# Altium PCB C2Sv0_PROCESSOR.PcbDoc (part 3 of 3)
Units mm, origin at the board's own origin, x right, y up, seen from the top; angles counter-clockwise.
Board outline 116 x 70 mm, 4 copper layers (Top Layer, Mid Layer 1, Mid Layer 2, Bottom Layer), stack 1.57 mm thick; 172 components, 108 nets, 793 pads, 402 vias.
Unrouted connection lines stored in the file: 3.
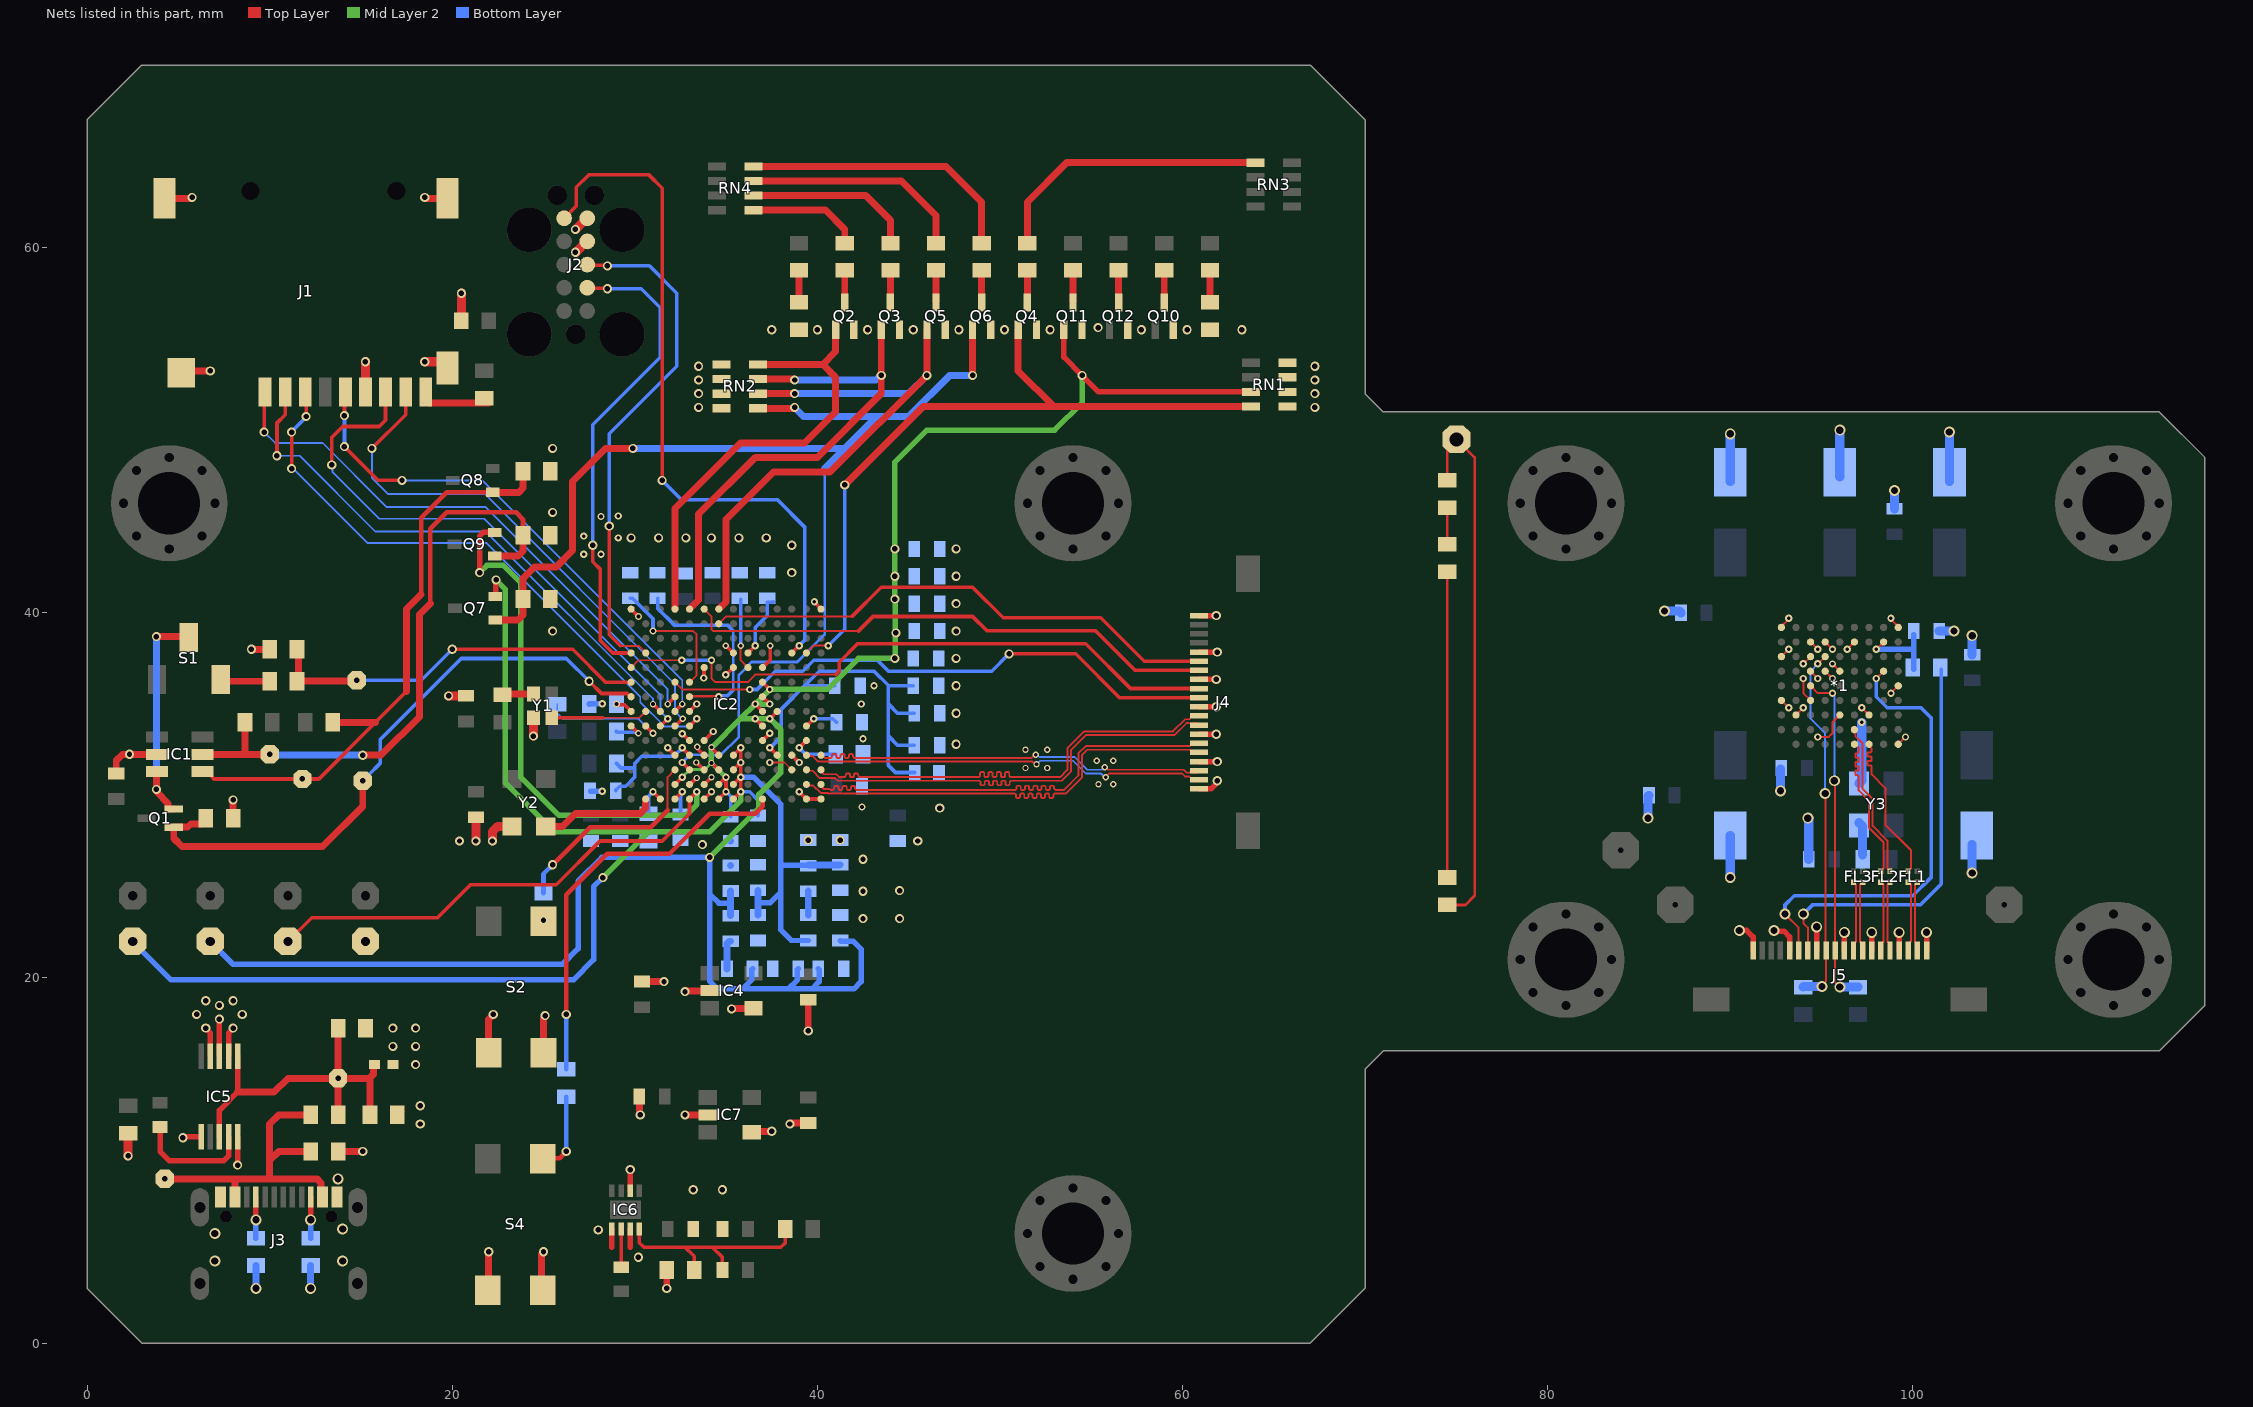
[diagram p4: the nets of this part, all layers, seen from the top]

## Via types
v1: diameter 0.5, hole 0.3, Top Layer to Bottom Layer, tented both sides, 208 vias
v2: diameter 0.4, hole 0.2, Top Layer to Bottom Layer, tented both sides, 112 vias
v3: diameter 0.6, hole 0.4, Top Layer to Bottom Layer, tented both sides, 47 vias
v4: diameter 0.35, hole 0.2, Top Layer to Bottom Layer, tented both sides, 28 vias
v5: diameter 1, hole 0.5, Top Layer to Bottom Layer, tented both sides, 3 vias
v6: diameter 2.5, hole 2, Top Layer to Bottom Layer, 2 vias
v7: diameter 0.7, hole 0.4, Top Layer to Bottom Layer, tented both sides, 2 vias

## Nets (pads, with @x,y where several pads share a name; then routed paths per layer and width w, separated by ;. In a path a pad name is that pad's centre, name@x,y a point inside that pad or via, vN(x,y) a via of type N, cw(c..) or ccw(c..) an arc to the next point about the centre after c; other vN are vias at no path point) (continued)
AR_DATA0_P: *1.G1 FL1.4 | length 8.7
  Top Layer w0.11: *1.G1@97.6,32.8 97.6,32.736 97.745,32.591 97.745,32.423 97.681,32.358 97.536,32.358 97.512,32.334 97.512,32.145 97.536,32.121 97.721,32.121 97.745,32.097 97.745,31.908 97.721,31.884 97.536,31.884 97.512,31.86 97.512,31.671 97.536,31.647 97.681,31.647 97.745,31.583 97.745,31.528 97.745,31.155 98.5,30.4 98.5,28.4 99.894,27.006 99.894,25.994 FL1.4@99.75,25.85
AR_DATA1_N: *1.F2 FL2.1 | length 8.6
  Top Layer w0.11: *1.F2@96.8,33.6 96.855,33.545 96.855,33.249 97.243,32.861 97.243,32.607 97.243,30.357 97.8,29.8 97.8,28.326 98.606,27.52 98.606,25.994 FL2.1@98.75,25.85
AR_DATA1_P: *1.F1 FL2.4 | length 8.6
  Top Layer w0.11: *1.F1@96.8,32.8 96.839,32.8 97.032,32.607 97.032,32.369 96.967,32.304 96.872,32.304 96.848,32.281 96.848,32.091 96.872,32.067 97.008,32.067 97.032,32.044 97.032,31.854 97.008,31.83 96.872,31.83 96.848,31.807 96.848,31.617 96.872,31.593 97.008,31.593 97.032,31.57 97.032,31.38 97.008,31.356 96.872,31.356 96.848,31.333 96.848,31.143 96.872,31.119 96.967,31.119 97.032,31.055 97.032,31 97.032,30.269 97.588,29.712 97.588,28.238 98.394,27.432 98.394,25.994 FL2.4@98.25,25.85
AR_RST: IC2.F14 J4.14 | length 29.6
  Top Layer w0.102: IC2.F14@33.8,40.2 34.2,39.8 34.2,39.1 34.3,39 42.25,39
  Top Layer w0.2: 42.25,39 43.05,39.8 48.5,39.8 49.275,39.025 55.225,39.025 57.4,36.85 J4.14@60.9,36.85
AR_RST_PIN: *1.H8 C41.2 R15.2 | length 4.5
  Top Layer w0.11: v2(98,38) *1.H8@98.4,38.4
  Bottom Layer w0.3: v2(98,38) 100.05,38 ; R15.2@100.05,36.9 100.05,38 ; C41.2@100.05,38.8 100.05,38
AR_SCLK: *1.C5 J5.10 R10.2 | length 18.6
  Top Layer w0.11: *1.C5@94.4,36 94.8,35.6 v2(95.6,35.6) ; v3(95.7,30.8) 95.725,30.775 95.725,21.525 J5.10@95.75,21.5 95.75,19.75 v3(96,19.5)
  Bottom Layer w0.11: v2(95.6,35.6) 95.6,35.535 95.7,35.435 v3(95.7,30.8)
  Bottom Layer w0.5: v3(96,19.5) R10.2@97,19.5
AR_SDATA: *1.D7 J5.9 R13.2 | length 19.9
  Top Layer w0.11: v2(94.8,37.204) 94.802,37.204 95.198,37.6 *1.D7@95.2,37.6 ; v3(95.027,19.527) 95.027,19.633 95.25,19.856 J5.9@95.25,21.5 95.225,21.525 95.225,30.075 v3(95.2,30.1)
  Bottom Layer w0.11: v2(94.8,37.204) 94.4,36.804 94.4,34.2 95.2,33.4 v3(95.2,30.1)
  Bottom Layer w0.5: R13.2@94,19.5 94.027,19.527 v3(95.027,19.527)
AR_TEMP_FLAG: *1.H6 J5.6 | length 25.2
  Top Layer w0.11: v3(93,23.5) 93.75,22.75 J5.6@93.75,21.5 ; v2(98,36.4) *1.H6@98.4,36.8
  Bottom Layer w0.2: v3(93,23.5) 93,24 93.5,24.5 100,24.5 101,25.5 101,34.25 100.45,34.8 98.6,34.8 98,35.4 v2(98,36.4)
BOOT0: IC2.D3 R9.2 | length 11.7
  Top Layer w0.102: 31.8,29.175 31.8,31 IC2.D3@32.2,31.4
  Top Layer w0.254: v1(25.5,26.2) 27.55,28.25 30.875,28.25 31.8,29.175
  Bottom Layer w0.254: R9.2@25,24.65 25,25.7 v1(25.5,26.2)
CSI_REXT: IC2.N5 R11.2 | length 2.7
  Top Layer w0.2: v2(39,32.6) IC2.N5@39.4,33
  Bottom Layer w0.2: v2(39,32.6) 39.35,32.25 R11.2@41,32.25
DEBUG_DRAIN: D6.A RN3.5 | length 15.6
  Top Layer w0.381: D6.A@51.5,60.25 51.5,62.5 53.65,64.65 RN3.5@64,64.65
DEBUG_LED: IC2.N11 Q4.1 RN1.7 | length 39.6
  Top Layer w0.102: IC2.N11@39.4,37.8 39.8,38.2 v2(40.6,38.2)
  Top Layer w0.381: v1(41.5,47) 45.8,51.3 52.95,51.3 ; Q4.1@51,55.5 51,53.25 52.95,51.3 ; RN1.7@63.75,51.3 52.95,51.3
  Bottom Layer w0.2: v2(40.6,38.2) 41.5,39.1 v1(41.5,47)
DGND: *1.A4 *1.A7 *1.A9 *1.B3 *1.C4 *1.C6 *1.C7 *1.C8 *1.D6 *1.D8 *1.E3 *1.E6 *1.F8 *1.G3 *1.J1 *1.J5 *1.J9 C39.1 C41.1 C42.1 C43.1 C44.1 C45.1 C46.1 C47.1 C48.1 C49.1 C50.1 C51.1 J5.1 J5.5 J5.8 J5.11 J5.14 J5.17 J5.20 NT1.2 Y3.2 | length 44.5
  Top Layer w0.11: *1.A4@92.8,35.2 92.802,35.2 93.2,34.802 v2(93.202,34.802) ; *1.A7@92.8,37.6 v2(93.2,38) ; *1.A9@92.8,39.2 92.8,39.25 93.2,39.65 v2(93.2,39.7) ; *1.B3@93.6,34.4 v2(94,34.8) ; v2(94,36.4) 94,35.6 *1.C4@94.4,35.2 ; v2(94,37.204) 94.002,37.204 94.398,37.6 *1.C7@94.4,37.6 ; *1.C6@94.4,36.8 v2(94.8,36.4) ; *1.C8@94.4,38.4 v2(94.8,38) ; v2(94.8,33.2) 95.4,33.2 95.6,33.4 95.6,34 *1.E3@96,34.4 ; *1.D6@95.2,36.8 v2(95.6,36.4) ; *1.D8@95.2,38.399 v2@95.598,38.001 ; v2(95.6,37.2) *1.E6@96,36.8 ; v2@96.402,38.001 *1.F8@96.8,38.399 ; v2(97.2,34.8) *1.G3@97.6,34.4 ; v2(98.8,39.7) 98.8,39.65 99.2,39.25 *1.J9@99.2,39.2 ; v2@98.802,35.601 *1.J5@99.2,35.999 ; *1.J1@99.2,32.8 v2(99.6,33.2)
  Top Layer w0.3: v3(90.5,22.6) 90.9,22.6 91.25,22.25 J5.1@91.25,21.5 ; v3(92.4,22.6) 92.438,22.562 92.938,22.562 93.25,22.25 J5.5@93.25,21.5 ; v3(94.732,22.8) 94.75,22.782 J5.8@94.75,21.5 ; J5.11@96.25,21.5 v3(96.25,22.5) ; J5.14@97.75,21.5 v3(97.75,22.5) ; J5.17@99.25,21.5 v3(99.25,22.5) ; J5.20@100.75,21.5 v3(100.75,22.5)
  Bottom Layer w0.11: C50.1@92.75,31.45 C50.1@92.8,31.5
  Bottom Layer w0.5: v3(85.5,28.75) 85.5,29.95 C48.1@85.55,30 ; v3(86.4,40.1) 87.2,40.1 C49.1@87.3,40 ; v3(90,25.5) C43.1@90,27.8 ; C46.1@90,47.2 v3(90,49.8) ; v3(92.75,30.25) C50.1@92.75,31.45 ; C39.1@94.3,26.5 v3@94.3,28.75 ; C44.1@96,47.45 C44.1@96,47.7 v3(96,50) ; Y3.2@97.05,30.65 97.2,30.8 v2(97.2,34) ; C51.1@99,45.7 v3(99,46.7) ; C41.1@101.45,39 v3(102.25,39) ; C45.1@102,47.2 C45.1@102,47.7 v3(102,49.9) ; v3(103.25,25.75) C42.1@103.25,27.3 ; C47.1@103.25,37.7 v3(103.25,38.75)
  other v2: 98.802,35.6 95.598,38 96.402,38
  other v3: 94.25,28.75
EN_3V3: EN3V3.TP IC1.4 Q8.1 R8.2 R21.1 | length 32.7
  Top Layer w0.2: IC1.4@6.325,31.3 6.625,31.3 6.825,31.1 6.825,31.017 6.942,30.9 EN3V3.TP@11.8,30.9 12.7,30.9 15.8,34 17.5,35.7
  Top Layer w0.254: 18.3,41 18.3,45.2 19.7,46.6 Q8.1@22.225,46.6
  Top Layer w0.381: R8.2@13.45,34 15.8,34 ; 17.5,35.7 17.5,40.2 18.3,41 ; Q8.1@22.225,46.6 23.652,46.6 23.875,46.823 R21.1@23.875,47.75
EN_VDDAON: ENAON.TP IC1.5 Q9.1 R5.2 R22.1 | length 34.1
  Top Layer w0.254: 18.8,40.5 18.8,44.6 19.7,45.5 23.5,45.5 23.875,45.125 R22.1@23.875,44.25
  Top Layer w0.381: IC1.5@6.325,32.25 8.6,32.25 ; R5.2@8.65,34 8.65,32.3 8.6,32.25 ; ENAON.TP@10,32.25 8.6,32.25 ; v1(15.1,32.2) 16.1,32.2 18.2,34.3 18.2,39.9 18.8,40.5 ; Q9.1@22.325,43.1 23.6,43.1 23.875,43.375 R22.1@23.875,44.25
  Bottom Layer w0.381: ENAON.TP@10,32.25 10.05,32.2 v1(15.1,32.2)
GND: C1.1 C2.1 C3.1 C4.1 C5.1 C6.1 C7.1 C8.1 C9.1 C10.1 C11.1 C12.1 C13.2 C14.2 C15.2 C16.2 C17.2 C18.1 C19.2 C20.1 C21.2 C22.2 C23.2 C24.2 C25.2 C26.2 C27.2 C28.2 C29.1 C30.2 C31.2 C32.1 C33.1 C34.2 C35.1 C36.1 C37.1 C38.1 C40.2 C54.2 C55.1 C56.1 C69.1 C70.1 C71.1 C72.1 C74.2 C75.2 C76.1 C77.2 D9.1 GND.TP IC1.2 IC2.A14 IC2.E2 IC2.E7 IC2.F1 IC2.F2 IC2.F3 IC2.F4 IC2.F5 IC2.F10 IC2.H10 IC2.H11 IC2.K5 IC2.K10 IC2.M4 IC2.N1 IC2.P1 IC2.P14 IC4.2 IC4.4 IC5.2 IC5.3 IC5.4 IC5.6 IC5.10 IC6.1 IC6.3 IC6.6 IC7.2 IC7.4 J1.6 J1.G1 J1.G2 J1.G3 J1.G4 J2.4 J2.5 J3.A1B12 J3.B1A12 J4.1 J4.4 J4.7 J4.10 J4.13 J4.16 J4.20 L1.2 L2.2 Q2.2 Q3.2 Q4.2 Q5.2 Q6.2 Q10.2 Q11.2 Q12.2 R1.2 R4.1 R6.1 R11.1 R12.2 R17.2 R18.2 R21.2 R22.2 R23.2 R24.2 R40.1 R46.2 RN1.2 RN1.4 RN1.6 RN1.8 RN2.2 RN2.4 RN2.6 RN2.8 S2.1 S2.3 S4.1 S4.3 Y1.2 Y2.2 | length 78.8
  Top Layer w0.2: IC2.A14@29.8,40.2 v2(30.2,39.8) ; IC2.E2@33,30.6 33.025,30.6 33.375,30.95 v4(33.4,30.95) ; IC2.E7@33,34.6 v2(33.4,35) ; v4(33.373,31.8) 33.387,31.8 33.787,31.4 IC2.F3@33.8,31.4 ; v4(33.422,32.652) 33.441,32.633 33.441,32.559 IC2.F4@33.8,32.2 ; v2(33.775,36.425) 33.788,36.438 33.788,36.988 IC2.F10@33.8,37 ; IC2.F1@33.8,29.8 v2(34.2,30.2) ; IC2.F2@33.8,30.6 33.803,30.6 34.197,30.994 v4(34.2,30.994) ; IC2.F5@33.8,33 v2(34.3,33.5) ; v2(34.987,36.6) 34.993,36.6 35.393,37 IC2.H10@35.4,37 ; v4(34.987,38.2) 34.993,38.2 35.393,37.8 IC2.H11@35.4,37.8 ; IC2.K5@37,33 v2(37.4,33.4) ; IC2.K10@37,37 37.414,37.414 37.414,38.187 v4(37.427,38.2) ; IC2.M4@38.6,32.2 v2(39,31.8) ; v2(39,30.2) IC2.N1@39.4,29.8 IC2.P1@40.2,29.8 ; v2(39.839,40.6) 39.839,40.581 40.2,40.219 IC2.P14@40.2,40.2
  Top Layer w0.3: v1(5.25,11.25) 5.3,11.3 IC5.6@6.25,11.3 ; v1(6.5,17.25) 6.5,17.222 6.75,16.972 IC5.4@6.75,15.7 ; IC5.3@7.25,15.7 v1(7.25,17.75) ; IC5.2@7.75,15.7 7.75,16.972 8,17.222 v1(8,17.25) ; v1(8.25,9.75) IC5.10@8.25,11.3 ; 28.75,5.25 IC6.1@28.75,6.25 ; 29.75,5.25 IC6.3@29.75,6.25 ; IC6.6@29.75,8.35 v1(29.75,9.5) ; J4.1@60.9,30.35 61.562,30.35 61.877,30.665 61.877,30.777 v1(61.9,30.8) ; J4.4@60.9,31.85 v1(61.9,31.85) ; J4.7@60.9,33.35 v1(61.85,33.35) ; J4.10@60.9,34.85 v1(61.85,34.85) ; J4.13@60.9,36.35 v1(61.85,36.35) ; J4.16@60.9,37.85 v1(61.9,37.85) ; J4.20@60.9,39.85 v1(61.85,39.85)
  Top Layer w0.381: C37.1@1.6,31.2 1.6,31.9 1.938,32.238 2.313,32.238 v1(2.325,32.25) IC1.2@3.825,32.25 ; J1.G2@4.25,62.7 5.668,62.7 5.718,62.75 v1(5.75,62.75) ; J1.G1@5.15,53.15 5.25,53.25 v1@6.718,53.25 ; R1.2@8,28.75 v1(8,29.75) ; v1(9,38) R46.2@10,38 ; C56.1@13.75,10.5 v1(15.1,10.5) ; C55.1@17,12.5 C55.1@17.21,12.71 ; v1(18.5,62.75) 18.532,62.75 18.582,62.7 J1.G3@19.75,62.7 ; v1(22,5) 22,3.51 22.11,3.4 S4.3@22.4,3.4 ; S2.3@22,15.9 22,17.718 22.25,17.968 v1(22.25,18) ; S4.1@24.9,2.9 24.9,4.868 25,4.968 v1(25,5) ; S2.1@25,15.9 25,17.811 25.089,17.9 v1(25.089,17.933) ; v1(26.75,59.75) v1@26.78,59.75 ; v1(26.75,61) v1@26.77,61 ; J2.4@27.37,60.34 J2.4@27.4,60.34 ; J2.5@27.38,61.61 J2.5@27.4,61.61 ; C77.2@30.25,13.5 30.25,12.582 30.3,12.532 v1(30.3,12.5) ; C72.1@30.4,19.8 v1(31.6,19.8) ; v1(31.75,3) R40.1@31.75,4 ; v1(32.75,12.5) IC7.2@34,12.5 ; v1(32.75,19.25) 32.773,19.273 34.073,19.273 IC4.2@34.1,19.3 ; v1(35.3,18.3) 35.323,18.323 36.473,18.323 IC4.4@36.5,18.35 ; IC7.4@36.4,11.55 36.427,11.577 37.477,11.577 v1(37.5,11.6) ; v1(38.5,12) 38.532,12 38.582,12.05 C76.1@39.5,12.05 ; v1(39.5,17.1) C71.1@39.5,18.8
  Top Layer w0.5: v1(2.25,10.25) C70.1@2.25,11.5 ; J1.6@15.25,52.1 v1(15.25,53.75) ; v1(18.5,53.75) 19.4,53.75 J1.G4@19.75,53.4 ; v1(19.8,35.45) C38.1@20.75,35.45 ; C54.2@20.5,56 v1(20.5,57.5) ; v1(21.3,27.5) C40.2@21.3,28.8 ; v1(22.2,27.5) 22.2,28 22.5,28.3 Y2.2@23.275,28.3 ; v1(24.45,33.25) Y1.2@24.45,34.25 ; v1@26.77,61 J2.5@27.38,61.61 ; v1@26.78,59.75 J2.4@27.37,60.34
  Bottom Layer w0.102: C11.1@27.55,30.25 C11.1@27.58,30.22
  Bottom Layer w0.3: R6.1@27.5,35 27.52,35.02 v2(28.212,35.02) ; C11.1@27.58,30.22 v2(28.212,30.22)
  Bottom Layer w0.381: v3(9.25,3) R18.2@9.25,4.25 ; v3(12.25,3) R17.2@12.25,4.25 ; C31.2@35.05,20.5 35.05,21.88 35.179,22.01 C30.2@35.25,22.01 ; C4.1@39.5,23.45 C5.1@39.5,24.75
  other v1: 30.2,4.7 28,6.2 33.2,8.4 34.8,8.4 18.25,12 18.25,13 18,15.25 16.75,16.25 18,16.25 16.75,17.25 18,17.25 6,18 8.5,18 7.25,18.5 6.5,18.75 8,18.75 42.5,23.25 44.5,23.25 42.5,24.75 44.5,24.779 42.5,26.5 33.7,27.3 20.4,27.5 45.5,27.5 39.5,27.55 41.25,27.55 46.7,29.3 47.6,32.8 47.6,34.5 47.6,36 47.6,37.5 25.5,39 47.6,39 47.6,40.5 47.6,42 38.6,42.2 47.6,43.5 38.6,43.7 29.8,44.1 31.3,44.1 32.8,44.1 34.2,44.1 35.7,44.1 37.2,44.1 25.5,45.5 25.5,49 33.5,51.25 67.25,51.25 33.5,52 67.25,52 33.5,52.75 67.25,52.75 6.75,53.25 33.5,53.5 67.25,53.5 37.5,55.5 40,55.5 42.75,55.5 45.25,55.5 47.75,55.5 50.25,55.5 52.75,55.5 57.75,55.5 60.25,55.5 63.25,55.5 55.374,55.624
  other v2: 42.443,29.36 42.5,33.1 42.4,35 43.1,36 27.2,43.2 28.15,43.2 29.1,44.1 27.2,44.2 28.15,45.275 29.1,45.3
  other v3: 7,4.5 14,4.5 7,6 14,6.25 13.75,9
  other v4: 55.4,30.6 56.2,30.6 51.4,31.5 52.6,31.5 55.3,31.9 56.2,31.9 51.4,32.5 52.6,32.5
HSE_CLK: IC2.B7 Y1.3 | length 5.3
  Top Layer w0.102: 28.25,34.25 30.25,34.25 IC2.B7@30.6,34.6
  Top Layer w0.2: Y1.3@25.45,34.25 28.25,34.25
HSE_CLK_OUT: IC2.A7 R6.2 | length 1
  Top Layer w0.2: v2(29,35) 29.038,34.962 29.438,34.962 IC2.A7@29.8,34.6
LSE_CLK: IC2.B1 Y2.3 | length 6.4
  Top Layer w0.381: Y2.3@25.125,28.3 26.05,28.3 26.75,29 30.3,29 30.598,29.298 30.598,29.798 IC2.B1@30.6,29.8
LSE_OUT: IC2.C1 R24.1 | length 1.9
  Top Layer w0.2: v2(31,30.2) IC2.C1@31.4,29.8
  Bottom Layer w0.2: R24.1@30.75,29 30.75,29.95 v2(31,30.2)
MCU_ACT_DRAIN: D8.A RN4.8 | length 15.6
  Top Layer w0.381: RN4.8@36.5,64.45 47.05,64.45 49,62.5 D8.A@49,60.25
MCU_SEQ: IC2.A8 Q1.1 R1.1 SEQ.TP | length 34.3
  Top Layer w0.2: v1(27.5,36.25) 28.172,35.578 29.586,35.578 29.764,35.4 IC2.A8@29.8,35.4
  Top Layer w0.381: R1.1@6.598,28.848 R1.1@6.5,28.75 6.5,28.65 6.29,28.44 5.691,28.44 5.51,28.26 4.76,28.26 Q1.1@4.75,28.25 4.75,27.65 5.2,27.2 12.9,27.2 15.1,29.4 SEQ.TP@15.1,30.8
  Bottom Layer w0.2: SEQ.TP@15.398,31.098 16.05,31.75 16.05,33.05 20.5,37.5 26.25,37.5 v1(27.5,36.25)
MCU_SEQ_s: IC2.A9 R45.1 R46.1 SEQS.TP | length 21.4
  Top Layer w0.2: v1(20,38) 26.6,38 28.4,36.2 IC2.A9@29.8,36.2
  Top Layer w0.381: R46.1@11.575,38 11.575,36.25 11.6,36.275 14.75,36.275 SEQS.TP@14.775,36.3
  Bottom Layer w0.2: SEQS.TP@14.775,36.3 18.3,36.3 v1(20,38)
MID_CLK_N: FL3.2 J5.13 | length 3.9
  Top Layer w0.11: J5.13@97.25,21.5 97.25,21.85 97.106,21.994 97.106,25.106 FL3.2@97.25,25.25
MID_CLK_P: FL3.3 J5.12 | length 3.9
  Top Layer w0.11: J5.12@96.75,21.5 96.75,21.85 96.894,21.994 96.894,25.106 FL3.3@96.75,25.25
MID_DATA0_N: FL1.2 J5.19 | length 3.9
  Top Layer w0.11: J5.19@100.25,21.5 100.25,21.85 100.106,21.994 100.106,23.393 100.106,25.106 FL1.2@100.25,25.25
MID_DATA0_P: FL1.3 J5.18 | length 3.9
  Top Layer w0.11: J5.18@99.75,21.5 99.75,21.85 99.894,21.994 99.894,23.481 99.894,25.106 FL1.3@99.75,25.25
MID_DATA1_N: FL2.2 J5.16 | length 3.9
  Top Layer w0.11: J5.16@98.75,21.5 98.75,21.85 98.606,21.994 98.606,25.106 FL2.2@98.75,25.25
MID_DATA1_P: FL2.3 J5.15 | length 3.9
  Top Layer w0.11: J5.15@98.25,21.5 98.25,21.85 98.394,21.994 98.394,25.106 FL2.3@98.25,25.25
MID_RST: J5.7 R15.1 | length 22.1
  Top Layer w0.11: v3(94,23.5) 94,23 94.25,22.75 J5.7@94.25,21.5
  Bottom Layer w0.2: v3(94,23.5) 94.5,24 100.4,24 101.55,25.15 R15.1@101.55,36.9
NetC20_2: C20.2 IC2.N6 | length 1.9
  Top Layer w0.2: IC2.N6@39.4,33.8 v2(39.8,34.2)
  Bottom Layer w0.2: v2(39.8,34.2) 40.85,34.2 C20.2@41.05,34
NetC55_2: C55.2 C69.2 D9.2 FB1.1 IC5.1 IC5.8 VIN.TP | length 20.1
  Top Layer w0.3: IC5.8@7.25,11.3 7.25,12.75 8.25,13.75 8.25,14.25 IC5.1@8.25,15.7
  Top Layer w0.381: 8.25,13.75 10.25,13.75 11,14.5 VIN.TP@13.75,14.5 ; FB1.1@13.75,12.5 VIN.TP@13.75,14.5 ; C69.2@13.75,17.25 VIN.TP@13.75,14.5 ; C55.2@15.5,12.5 15.5,14.457 15.457,14.5 ; D9.2@15.86,15.191 15.681,15.191 15.681,14.723 15.457,14.5 ; VIN.TP@13.75,14.5 15.457,14.5
NetC73_2: C73.2 IC6.4 R39.2 R40.2 | length 12.6
  Top Layer w0.2: IC6.4@30.25,6.25 30.25,5.5 30.5,5.25 32.75,5.25 ; R40.2@33.25,4 33.25,4.75 32.75,5.25 ; C73.2@34.8,4 34.8,4.7 34.25,5.25 ; R39.2@38.25,6.25 38.25,5.5 38,5.25 37.25,5.25 34.25,5.25 ; 32.75,5.25 34.25,5.25
NetD1_K: D1.K Q2.3 | length 1.7
  Top Layer w0.381: Q2.3@41.5,57 D1.K@41.5,58.75
NetD2_K: D2.K Q3.3 | length 1.7
  Top Layer w0.381: Q3.3@44,57 D2.K@44,58.75
NetD3_K: D3.K R12.1 | length 1.8
  Top Layer w0.381: R12.1@39,57 D3.K@39,58.75
NetD4_K: D4.K Q10.3 | length 1.7
  Top Layer w0.381: Q10.3@59,57 D4.K@59,58.75
NetD5_K: D5.K Q11.3 | length 1.7
  Top Layer w0.381: Q11.3@54,57 D5.K@54,58.75
NetD6_K: D6.K Q4.3 | length 1.7
  Top Layer w0.381: Q4.3@51.5,57 D6.K@51.5,58.75
NetD7_K: D7.K Q5.3 | length 1.7
  Top Layer w0.381: Q5.3@46.5,57 D7.K@46.5,58.75
NetD8_K: D8.K Q6.3 | length 1.7
  Top Layer w0.381: Q6.3@49,57 D8.K@49,58.75
NetD10_K: D10.K R4.2 | length 1.7
  Top Layer w0.381: R4.2@61.5,57 D10.K@61.5,58.75
NetD11_K: D11.K Q12.3 | length 1.7
  Top Layer w0.381: Q12.3@56.5,57 D11.K@56.5,58.75
NetIC2_K1: IC2.K1 R50.2 | length 22.7
  Top Layer w0.254: v1(26.25,18) 26.25,24.55 28.5,26.8 31.9,26.8 34.1,29 36.6,29 37,29.4 IC2.K1@37,29.8
  Bottom Layer w0.254: R50.2@26.25,15 v1(26.25,18)
NetIC5_9: IC5.9 L3.2 | length 6.5
  Top Layer w0.3: L3.2@4,11.84 4,10.5 4.5,10 7.5,10 7.75,10.25 IC5.9@7.75,11.3
NetIC6_2: IC6.2 L4.1 | length 2.4
  Top Layer w0.2: IC6.2@29.25,6.25 L4.1@29.25,4.16 L4.1@29.462,4.38
NetJ1_CD1: J1.CD1 R37.2 | length 4
  Top Layer w0.381: J1.CD1@18.55,52.1 18.55,51.66 18.71,51.5 R37.2@22,51.5
NetR9_1: R9.1 S2.2
  other v1: 25,23.15
NetR14_2: R14.2 Y3.1 | length 1.8
  Bottom Layer w0.5: Y3.1@97.05,28.5 97.25,28.3 R14.2@97.25,26.75
NetR20_1: R20.1 R25.1 | length 2
  Top Layer w0.15: R20.1@74.5,43.75 R25.1@74.5,45.75
NetR20_2: R20.2 R26.2 | length 16.8
  Top Layer w0.15: R26.2@74.5,25.5 R20.2@74.5,42.25
NetR25_2: pad.2 R25.2 R26.1 | length 29.6
  Top Layer w0.15: R26.1@74.5,24 75.5,24 76,24.5 76,48.5 pad.2@75,49.5 74.5,49 R25.2@74.5,47.25
NetR38_2: R38.2 Y1.1 | length 1.8
  Top Layer w0.381: R38.2@22.7,35.55 Y1.1@24.45,35.55
NetR45_2: R45.2 S1.3 | length 2.8
  Top Layer w0.381: S1.3@7.325,36.35 7.425,36.25 R45.2@10.075,36.25
NetR50_1: R50.1 S4.2 | length 4.5
  Top Layer w0.254: S4.2@24.95,10.1 24.982,10.132 25.882,10.132 v1(26.25,10.5)
  Bottom Layer w0.254: v1(26.25,10.5) R50.1@26.25,13.5
NRST: C11.2 IC2.E4 R7.2 | length 6.7
  Top Layer w0.2: v2(32.6,32.6) IC2.E4@33,32.2
  Bottom Layer w0.2: C11.2@28.95,30.25 28.95,30.28 29.17,30.5 29.5,30.5 30,31 30,31.5 ; R7.2@29,31.75 29.25,31.5 30,31.5 ; v2(32.6,32.6) 32.139,32.139 30.389,32.139 30,31.75 30,31.5
PS_EN: IC1.3 Q1.2 S1.2 | length 12.8
  Top Layer w0.381: v1(3.8,38.7) 5.525,38.7 S1.2@5.575,38.65 ; IC1.3@3.825,31.3 3.825,31.218 3.798,31.191 v1(3.798,30.33) 3.821,30.307 3.821,30.179 4.44,29.559 4.44,29.259 4.45,29.25 Q1.2@4.75,29.25
  Bottom Layer w0.381: v1(3.798,30.33) 3.799,30.331 3.799,38.699 v1(3.8,38.7)
PWR_ON: IC2.E3 Q6.1 Q7.1 R23.1 RN2.1 | length 68.2
  Top Layer w0.2: v2(32.6,31.8) IC2.E3@33,31.4
  Top Layer w0.381: Q7.1@22.35,39.6 23.6,39.6 23.875,39.875 R23.1@23.875,40.75 23.875,41.875 24.5,42.5 25.7,42.5 26.6,43.4 26.6,47.2 28.4,49 v1(29.9,49) ; RN2.1@36.75,51.2 v1@38.75,51.2 ; v1(48.5,53) Q6.1@48.5,55.5
  Bottom Layer w0.152: v2(32.6,31.8) 33.026,32.226 33.85,32.226 33.876,32.2 34.7,32.2 35.7,33.2 35.7,36.6 36.4,37.3 38.9,37.3 40.4,38.8 40.4,47.9
  Bottom Layer w0.381: v1(29.9,49) 41.5,49 ; v1(38.75,51.25) 39.25,50.75 43.25,50.75 ; 40.4,47.9 41.5,49 ; v1(48.5,53) 47.25,53 45,50.75 43.25,50.75 ; 41.5,49 43.25,50.75
READ_DRAIN: D1.A RN4.5 | length 6.2
  Top Layer w0.381: RN4.5@36.5,62.05 40.45,62.05 41.5,61 D1.A@41.5,60.25
READ_LED: IC2.D14 Q2.1 RN2.7 | length 25.1
  Top Layer w0.381: IC2.D14@32.2,40.206 32.2,45.7 35.8,49.3 39.3,49.3 41,51 41,52.9 40.3,53.6 ; RN2.7@36.75,53.6 40.3,53.6 ; Q2.1@41,55.5 41,54.3 40.3,53.6
SCLK: IC2.D9 J4.11 | length 31.2
  Top Layer w0.102: IC2.D9@32.2,36.2 32.6,35.8 v2(36.3,35.8)
  Top Layer w0.2: v1(50.5,37.75) 54.15,37.75 56.55,35.35 J4.11@60.9,35.35
  Bottom Layer w0.2: v2(36.3,35.8) 36.7,35.8 37.7,36.8 39.2,36.8 39.8,37.4 43.3,37.4 43.9,36.8 49.55,36.8 v1(50.5,37.75)
SDATA: IC2.A10 J4.12 | length 34.5
  Top Layer w0.102: IC2.A10@29.8,37 30.2,37.4 v2(32.575,37.4) ; v2(34.2,37.4) 34.2,36.425 34.419,36.206 36.181,36.206 36.589,36.614 41,36.614
  Top Layer w0.2: 41,36.614 41.193,36.807 41.193,37.293 42.2,38.3 54.7,38.3 57.15,35.85 J4.12@60.9,35.85
  Bottom Layer w0.2: v2(32.575,37.4) v2(34.2,37.4)
SDMMC1_CLK: IC2.D7 J1.5 | length 28.7
  Top Layer w0.2: v1(14.1,49.1) 15.95,47.25 v1(17.25,47.25) ; v1(14.1,50.8) 14.1,52.05 J1.5@14.15,52.1 ; IC2.D7@32.2,34.6 v4@32.601,35
  Bottom Layer w0.102: v1(17.25,47.25) 21.65,47.25 32.6,36.3 32.6,35.002 v4(32.602,35)
  Bottom Layer w0.2: v1(14.1,49.1) v1(14.1,50.8)
SDMMC1_CMD: IC2.E6 J1.3 | length 33.5
  Top Layer w0.2: v1(11.2,47.9) 11.204,47.904 11.204,49.891 v1(11.207,49.895) ; J1.3@11.95,52.1 12,52.05 v1(12,50.75) ; IC2.E6@33,33.8 v2(33.4,34.2)
  Bottom Layer w0.102: v1(11.2,47.9) 11.3,47.9 15.381,43.819 21.881,43.819 30.3,35.4 30.3,35.1 31.627,33.773 32.973,33.773 v2(33.4,34.2)
  Bottom Layer w0.2: v1(11.207,49.895) 11.207,49.926 12,50.719 v1(12,50.75)
SDMMC1_DAT0: IC2.C6 J1.7 | length 31.8
  Top Layer w0.2: v1(13.4,48.1) 13.4,49.6 14,50.2 16,50.2 16.35,50.55 J1.7@16.35,52.1 ; IC2.C6@31.4,33.8 v2(31.8,34.2)
  Bottom Layer w0.102: v1(13.4,48.1) 13.452,48.048 13.452,47.698 16,45.15 21.75,45.15 31.399,35.501 31.399,34.601 v2(31.8,34.2)
SDMMC1_DAT1: IC2.D6 J1.8 | length 29.4
  Top Layer w0.2: v1(15.6,49) 17.45,50.85 J1.8@17.45,52.1 ; IC2.D6@32.2,33.8 32.213,33.8 32.613,34.2 v4(32.627,34.2)
  Bottom Layer w0.102: v1(15.6,49) 15.6,47.4 16.5,46.5 21.8,46.5 32.201,36.099 32.201,34.599 32.6,34.2 v4(32.627,34.2)
SDMMC1_DAT2: IC2.D8 J1.1 | length 31.5
  Top Layer w0.2: v1(9.7,49.9) 9.7,52.05 J1.1@9.75,52.1 ; v4(31.8,35) IC2.D8@32.2,35.4
  Bottom Layer w0.102: v1(9.7,49.9) 10.3,49.3 12.9,49.3 16.4,45.8 21.8,45.8 31.8,35.8 v4(31.8,35)
SDMMC1_DAT3: IC2.C7 J1.2 | length 30.7
  Top Layer w0.2: v1(10.4,48.6) 10.4,50.4 10.85,50.85 J1.2@10.85,52.1 ; v4(30.998,35) IC2.C7@31.399,34.6
  Bottom Layer w0.102: v1(10.4,48.6) 11.65,48.6 15.8,44.45 21.85,44.45 30.998,35.302 v4@30.998,35.001
SENSOR_DRAIN: D7.A RN4.7 | length 12.3
  Top Layer w0.381: RN4.7@36.5,63.65 44.6,63.65 46.5,61.75 D7.A@46.5,60.25
SENSOR_LED: IC2.G14 Q5.1 RN2.3 | length 31.5
  Top Layer w0.381: IC2.G14@34.6,40.2 35,40.6 35,45.1 37.6,47.7 40.7,47.7 v1(46,53) Q5.1@46,55.5 ; RN2.3@36.75,52 v1(38.75,52)
  Bottom Layer w0.381: v1(38.75,52) 45,52 v1(46,53)
STM_CLK_N: IC2.N3 J4.8 | length 25.3
  Top Layer w0.102: IC2.N3@39.4,31.4 39.452,31.348 39.738,31.348 40.137,30.949 40.963,30.949 41.113,30.8 48.6,30.8 48.879,30.8 48.939,30.74 48.939,30.602 48.984,30.556 49.122,30.556 49.167,30.602 49.167,30.754 49.213,30.8 49.35,30.8 49.396,30.754 49.396,30.602 49.442,30.556 49.579,30.556 49.624,30.602 49.624,30.754 49.67,30.8 49.807,30.8 49.853,30.754 49.853,30.602 49.899,30.556 50.036,30.556 50.082,30.602 50.082,30.754 50.127,30.8 50.265,30.8 50.31,30.754 50.31,30.602 50.356,30.556 50.493,30.556 50.539,30.602 50.539,30.74 50.598,30.8 50.824,30.8 53.387,30.8 53.447,30.86 53.586,30.998 53.781,31.194 53.9,31.313 53.9,32.5 54.697,33.297 59.556,33.297 60.223,33.964 60.338,33.964 60.352,33.949 60.801,33.949 J4.8@60.9,33.85
STM_CLK_P: IC2.P3 J4.9 | length 25.3
  Top Layer w0.102: IC2.P3@40.2,31.4 40.2,31.321 40.303,31.218 40.303,31.212 40.363,31.153 41.047,31.153 41.084,31.116 41.197,31.003 41.497,31.003 41.557,31.063 41.557,31.161 41.603,31.206 41.74,31.206 41.786,31.161 41.786,31.049 41.831,31.003 41.968,31.003 42.014,31.049 42.014,31.161 42.06,31.206 42.197,31.206 42.243,31.161 42.243,31.063 42.302,31.003 42.582,31.003 48.8,31.003 48.851,31.003 48.91,31.063 48.91,31.234 48.956,31.28 49.093,31.28 49.139,31.234 49.139,31.049 49.185,31.003 49.322,31.003 49.368,31.049 49.368,31.234 49.413,31.28 49.55,31.28 49.596,31.234 49.596,31.049 49.642,31.003 49.779,31.003 49.825,31.049 49.825,31.234 49.87,31.28 50.008,31.28 50.053,31.234 50.053,31.049 50.099,31.003 50.236,31.003 50.282,31.049 50.282,31.234 50.328,31.28 50.465,31.28 50.511,31.234 50.511,31.063 50.57,31.003 50.9,31.003 53.303,31.003 53.697,31.397 53.697,32.584 54.613,33.5 59.472,33.5 60.139,34.167 60.367,34.167 60.55,34.35 J4.9@60.9,34.35
STM_DATA0_N: IC2.N4 J4.2 | length 22.4
  Top Layer w0.102: IC2.N4@39.4,32.2 39.452,32.148 39.738,32.148 40.03,31.856 40.05,31.856 40.055,31.851 51.782,31.851 51.933,31.7 v4(52,31.7) ; v4(55.8,31) 55.8,31.016 55.981,31.198 59.974,31.198 60.139,31.033 60.367,31.033 60.55,30.85 J4.2@60.9,30.85
  Bottom Layer w0.102: v4(52,31.7) 52.011,31.7 52.208,31.898 53.017,31.898 ; 53.018,31.898 54.002,31.898 54.702,31.198 55.527,31.198 55.583,31.141 55.616,31.141 55.757,31 v4(55.8,31)
STM_DATA0_P: IC2.P4 J4.3 | length 22.3
  Top Layer w0.102: IC2.P4@40.2,32.2 40.26,32.2 40.406,32.054 40.7,32.054 40.751,32.054 40.81,32.113 40.81,32.219 40.856,32.265 40.993,32.265 41.039,32.219 41.039,32.1 41.085,32.054 41.222,32.054 41.268,32.1 41.268,32.219 41.313,32.265 41.45,32.265 41.496,32.219 41.496,32.1 41.542,32.054 41.679,32.054 41.725,32.1 41.725,32.219 41.77,32.265 41.908,32.265 41.953,32.219 41.953,32.113 42.013,32.054 42.131,32.054 51.737,32.054 51.907,32.224 v4(51.968,32.224) ; v4(55.749,31.541) 55.793,31.541 55.933,31.401 60.058,31.401 60.223,31.236 60.338,31.236 60.352,31.251 60.801,31.251 J4.3@60.9,31.35
  Bottom Layer w0.102: v4(51.968,32.224) 52.028,32.224 52.152,32.101 52.933,32.101 ; 52.934,32.102 54.086,32.102 54.787,31.401 55.566,31.401 55.706,31.541 v4(55.749,31.541)
STM_DATA1_N: IC2.N2 J4.5 | length 25.3
  Top Layer w0.102: IC2.N2@39.4,30.6 39.452,30.548 39.738,30.548 39.907,30.379 39.944,30.379 40.187,30.137 40.583,30.137 40.619,30.1 50.532,30.1 50.812,30.1 50.871,30.04 50.871,29.905 50.917,29.86 51.054,29.86 51.1,29.905 51.1,30.054 51.146,30.1 51.283,30.1 51.328,30.054 51.328,29.905 51.374,29.86 51.511,29.86 51.557,29.905 51.557,30.054 51.603,30.1 51.74,30.1 51.786,30.054 51.786,29.905 51.831,29.86 51.968,29.86 52.014,29.905 52.014,30.054 52.06,30.1 52.197,30.1 52.243,30.054 52.243,29.905 52.289,29.86 52.426,29.86 52.471,29.905 52.471,30.054 52.517,30.1 52.654,30.1 52.7,30.054 52.7,29.905 52.746,29.86 52.883,29.86 52.929,29.905 52.929,30.04 52.988,30.1 53.066,30.1 53.6,30.1 54.503,31.003 54.503,32.216 54.786,32.498 60.402,32.498 60.55,32.35 J4.5@60.9,32.35
STM_DATA1_P: IC2.P2 J4.6 | length 25.3
  Top Layer w0.102: IC2.P2@40.2,30.6 40.2,30.521 40.29,30.431 40.29,30.399 40.35,30.34 40.667,30.34 40.704,30.303 40.734,30.303 40.868,30.303 40.927,30.363 40.927,30.471 40.973,30.517 41.11,30.517 41.156,30.471 41.156,30.349 41.201,30.303 41.339,30.303 41.384,30.349 41.384,30.471 41.43,30.517 41.567,30.517 41.613,30.471 41.613,30.349 41.659,30.303 41.796,30.303 41.842,30.349 41.842,30.471 41.887,30.517 42.024,30.517 42.07,30.471 42.07,30.363 42.13,30.303 42.409,30.303 50.8,30.303 50.851,30.303 50.91,30.363 50.91,30.481 50.956,30.526 51.093,30.526 51.139,30.481 51.139,30.349 51.185,30.303 51.322,30.303 51.368,30.349 51.368,30.481 51.413,30.526 51.55,30.526 51.596,30.481 51.596,30.349 51.642,30.303 51.779,30.303 51.825,30.349 51.825,30.481 51.87,30.526 52.008,30.526 52.053,30.481 52.053,30.349 52.099,30.303 52.236,30.303 52.282,30.349 52.282,30.481 52.328,30.526 52.465,30.526 52.511,30.481 52.511,30.349 52.556,30.303 52.693,30.303 52.739,30.349 52.739,30.481 52.785,30.526 52.922,30.526 52.968,30.481 52.968,30.363 53.027,30.303 53.304,30.303 53.516,30.303 54.3,31.087 54.3,32.3 54.702,32.702 60.402,32.702 60.55,32.85 J4.6@60.9,32.85
SWDCLK_TAG: IC2.B11 J2.3 | length 28.2
  Top Layer w0.102: 29.213,38.187 30.213,38.187 IC2.B11@30.6,37.8
  Top Layer w0.2: J2.3@27.4,59.07 27.435,59.035 28.465,59.035 v1(28.5,59) ; v1(28.6,44.75) 28.6,38.8 29.213,38.187
  Bottom Layer w0.2: v1(28.5,59) 30.8,59 32.3,57.5 32.3,53.5 28.6,49.8 v1(28.6,44.75)
SWDIO_TAG: IC2.A11 J2.2 | length 26.3
  Top Layer w0.2: J2.2@27.4,57.8 27.425,57.775 28.475,57.775 v1(28.5,57.75) ; v1(27.7,43.7) 27.7,42.8 28.1,42.4 28.1,38.5 28.8,37.8 IC2.A11@29.8,37.8
  Bottom Layer w0.2: v1(27.7,43.7) 27.7,50.3 31.4,54 31.4,56.7 30.35,57.75 v1(28.5,57.75)
SWO_TAG: IC2.M11 J2.6 | length 39.3
  Top Layer w0.2: J2.6@26.13,61.61 26.8,62.28 26.8,63.3 27.5,64 30.75,64 31.5,63.25 v1(31.5,47.25) ; IC2.M11@38.6,37.8 v2(39,38.2)
  Bottom Layer w0.2: v1(31.5,47.25) 32.55,46.2 37.8,46.2 39.3,44.7 39.3,38.5 v2(39,38.2)
TEMP_FLAG: IC2.G13 J4.15 | length 28.8
  Top Layer w0.102: IC2.G13@34.6,39.4 35,39.8 40.113,39.8 40.114,39.802 41.902,39.802
  Top Layer w0.2: 41.902,39.802 43.5,41.4 48.5,41.4 50.175,39.725 55.525,39.725 57.9,37.35 J4.15@60.9,37.35
UCPD1_C_C1: IC2.A6 R2.2 | length 1.8
  Top Layer w0.2: IC2.A6@29.8,33.8 v4(30.2,33.4)
  Bottom Layer w0.2: R2.2@29,33.5 29.042,33.458 30.115,33.458 30.173,33.4 v4(30.2,33.4)
UCPD1_C_C2: IC2.B6 R3.2 | length 6.8
  Top Layer w0.2: IC2.B6@30.6,33.8 v2(31,33.4)
  Bottom Layer w0.102: R3.2@25.75,35 25.75,34.5 26.05,34.2 30.2,34.2 v2(31,33.4)
USB_CC1: J3.A5 R18.1 | length 2.3
  Top Layer w0.3: v3(9.25,6.75) J3.A5@9.25,8.013
  Bottom Layer w0.3: R18.1@9.25,5.75 v3(9.25,6.75)
USB_CC2: J3.B5 R17.1 | length 2.3
  Top Layer w0.3: v3(12.25,6.75) J3.B5@12.25,8.013
  Bottom Layer w0.3: R17.1@12.25,5.75 v3(12.25,6.75)
V08CAP: C12.2 IC2.D1 | length 1.9
  Top Layer w0.2: IC2.D1@32.2,29.8 v2(32.6,30.2)
  Bottom Layer w0.2: C12.2@32.5,28.95 32.5,30.073 32.6,30.173 v2(32.6,30.2)
VBUS: C56.2 FB1.2 J3.A4B9 J3.B4A9 VBUS.TP | length 18.4
  Top Layer w0.381: VBUS.TP@4.25,9 8.125,9 ; J3.A4B9@8.1,8.013 8.1,8.975 8.125,9 ; C56.2@12.25,10.5 10.5,10.5 10,10 ; FB1.2@12.25,12.5 10.5,12.5 10,12 10,10 ; J3.B4A9@12.9,8.013 12.817,8.096 12.817,8.777 12.594,9 10,9 ; 8.125,9 10,9 ; 10,9 10,10
VDDAON: AON.TP C21.1 C22.1 C23.1 C24.1 IC2.D4 IC2.E1 IC2.E5 IC2.L4 IC2.M3 L1.1 Q9.2 | length 78.8
  Top Layer w0.102: v2(37.4,31.8) 38.2,31.8 IC2.M3@38.6,31.4
  Top Layer w0.2: AON.TP@11,22 12.3,23.3 19.2,23.3 21,25.1 25.7,25.1 28.1,27.5 31.5,27.5 33,29 IC2.E1@33,29.8 v2(33.4,30.2) ; v2(31.8,32.6) IC2.D4@32.2,32.2 ; v2(32.601,33.372) 32.614,33.372 32.987,33 IC2.E5@33,33 ; v2(37.4,32.6) IC2.L4@37.8,32.2
  Top Layer w0.3: v1(21.5,42.2) 21.5,44.2 21.7,44.4 Q9.2@22.325,44.4
  Mid Layer 2 w0.3: v1(21.5,42.2) 21.9,42.6 22.8,42.6 23.75,41.65 23.75,31 25.85,28.9 32.8,28.9 33.4,29.5 v2(33.4,30.2)
  Bottom Layer w0.2: v2(37.4,32.6) 38.031,33.231 38.031,34.731 39.3,36 ; C24.1@40.95,36 39.3,36 ; C23.1@45.25,36 45.247,35.997 43.903,35.997 ; C21.1@45.3,32.75 44.39,32.75 43.89,33.25 ; C22.1@45.3,34.5 44.39,34.5 43.89,35 ; L1.1@45.34,31.25 44.28,31.25 43.89,31.64 43.89,33.25 ; 39.3,36 40.1,36.8 43.1,36.8 43.903,35.997 ; 43.89,33.25 43.89,35 ; 43.89,35 43.89,35.985 43.903,35.997
VDDCORE: 0V8.TP C13.1 C14.1 C15.1 C16.1 C17.1 C29.2 C30.1 C31.1 C32.2 C33.2 C34.1 IC2.D2 IC2.G1 IC2.G2 IC2.G3 IC2.G4 IC2.K6 IC2.K7 IC2.K8 IC2.K9 IC2.L7 L2.1 Q11.1 RN1.5 | length 130
  Top Layer w0.2: IC2.D2@32.2,30.6 v2(32.6,31) ; v4(34.2,31.774) 34.213,31.774 34.587,31.4 IC2.G3@34.6,31.4 ; v4(34.199,32.626) 34.199,32.613 34.6,32.213 IC2.G4@34.6,32.2 ; IC2.G1@34.6,29.8 v2(35,30.2) v2(35,31) IC2.G2@34.6,30.6 ; v2(36.6,34.2) IC2.K6@37,33.8 ; v2(36.6,35) IC2.K7@37,34.6 ; IC2.K8@37,35.4 v2(37.4,35) ; IC2.K9@37,36.2 v2(37.4,35.8) ; v2(37.4,34.2) IC2.L7@37.8,34.6
  Top Layer w0.3: Q11.1@53.5,55.5 53.5,54 v1(54.5,53) 55.4,52.1 RN1.5@63.75,52.1
  Mid Layer 2 w0.15: v2(32.6,31) 33.019,31.419 33.846,31.419 v4(34.2,31.774)
  Mid Layer 2 w0.25: v4(34.2,31.774) 34.487,31.486 34.5,31.486 v2@34.986,31
  Mid Layer 2 w0.3: v1(34.1,26.6) 36.8,29.3 36.8,30.05 38,31.25 38,33.6 v2(37.4,34.2) v2(36.6,34.2) 35.8,34.2 ; v4@34.199,31.801 v4(34.199,32.626) 34.226,32.626 35.8,34.2 ; v2(37.4,35) v2(36.6,35) ; v1(54.5,53) 54.5,51.5 53,50 46,50 44.25,48.25 v1(44.25,43.5) v1(44.25,42) v1(44.25,40.75) 44.275,40.725 44.275,38.925 v1(44.3,38.9) 44.275,38.875 44.275,37.525 v1(44.25,37.5) 42.25,37.5 40.55,35.8 v2(37.4,35.8) v2(36.6,35) ; 35.8,34.2 v2(36.6,35)
  Bottom Layer w0.2: v2(35,30.2) 35.25,29.95 L2.1@35.25,28.82
  Bottom Layer w0.3: 0V8.TP@6.75,22 8,20.75 26.05,20.75 26.9,21.6 26.9,25.3 28.2,26.6 v1(34.1,26.6) 34.1,24.6 ; 35.25,24.085 35.235,24.1 34.6,24.1 34.1,24.6 ; C31.1@36.45,20.5 36.4,20.45 36.4,19.9 35.9,19.4 ; C32.2@38.95,20.5 38.9,20.45 38.9,19.9 38.4,19.4 38.3,19.4 ; C33.2@40.05,20.5 40.1,20.45 40.1,19.8 39.7,19.4 39.6,19.4 ; C34.1@41.25,22.05 41.294,22.006 41.969,22.006 42.4,21.575 42.4,19.8 42,19.4 39.6,19.4 ; 34.1,24.6 34.1,19.825 34.525,19.4 35.9,19.4 ; 35.9,19.4 38.3,19.4 ; 38.3,19.4 39.6,19.4
  Bottom Layer w0.381: C30.1@35.25,23.41 35.25,24.085 C29.2@35.25,24.76
VDDIO3_1: C25.1 IC2.J10 | length 3.9
  Top Layer w0.102: v4(35.813,38.2) 35.8,38.186 35.8,37.4 IC2.J10@36.2,37
  Bottom Layer w0.2: C25.1@35.8,40.738 35.813,40.724 v4(35.813,38.2)
VDDIO3_2: C26.1 IC2.J11 | length 3.6
  Top Layer w0.2: IC2.J11@36.2,37.8 v2(36.6,38.2)
  Bottom Layer w0.2: v2(36.6,38.2) 36.6,39.2 37.25,39.85 37.25,40.58 37.58,40.58 C26.1@37.587,40.587
VDDIO4_1: C28.1 IC2.E8 | length 11
  Top Layer w0.15: IC2.E8@33,35.4 33.025,35.425 34.575,35.425 v2(34.6,35.4)
  Bottom Layer w0.127: 35.4,35.775 35.4,39
  Bottom Layer w0.2: C28.1@31.25,40.8 31.25,40.25 32.175,39.325 35.075,39.325 35.4,39 ; v2(34.6,35.4) 34.638,35.438 35.063,35.438 35.4,35.775
VDDIO4_2: C27.1 IC2.E9 | length 7.6
  Top Layer w0.102: v2(31,39) 33.2,39 33.386,38.814 33.386,36.586 IC2.E9@33,36.2
  Bottom Layer w0.2: C27.1@29.75,40.8 29.875,40.8 31,39.675 v2(31,39)
VDDSMPS: C1.2 C2.2 C3.2 C4.2 C5.2 C6.2 IC2.H1 IC2.H2 IC2.H3 IC2.H4 Q7.2 SMPS.TP | length 86.5
  Top Layer w0.2: IC2.H1@35.4,29.8 v2(35.8,30.2) v2(35.8,31) ; IC2.H2@35.4,30.6 v2(35.8,31) ; IC2.H3@35.4,31.4 v2(35.8,31.8) ; IC2.H4@35.4,32.2 v2(35.8,32.6) v2(35.8,31.8) ; v2(35.8,31) v2(35.8,31.8)
  Top Layer w0.3: Q7.2@22.35,40.9 22.375,40.925 22.375,41.775 v1(22.4,41.8)
  Mid Layer 2 w0.3: v1(22.4,41.8) 22.9,41.3 22.9,30.7 25.6,28 30.75,28 ; v1(28.25,25.5) 30.75,28 ; v2(35.8,30.2) 35.8,29.7 34.1,28 30.75,28
  Bottom Layer w0.2: v2(35.8,30.2) 36.3,30.2 36.75,29.75 C1.2@36.75,28.9
  Bottom Layer w0.3: SMPS.TP@2.5,22 4.6,19.9 26.65,19.9 27.75,21 27.75,25 v1(28.25,25.5) ; v2(35.8,31) 36.5,31 38,29.5 38,26.175 ; 36.75,24.125 37.425,24.125 38,24.7 ; C4.2@39.5,22.05 38.575,22.05 38,22.625 38,24.7 ; C5.2@39.525,26.175 38,26.175 ; 38,24.7 38,26.175
  Bottom Layer w0.381: C3.2@36.75,23.45 36.75,24.125 C2.2@36.75,24.8 ; C5.2@39.525,26.175 41.225,26.175 C6.2@41.25,26.2
WRITE_DRAIN: D2.A RN4.6 | length 9.3
  Top Layer w0.381: RN4.6@36.5,62.85 42.65,62.85 44,61.5 D2.A@44,60.25
WRITE_LED: IC2.E14 Q3.1 RN2.5 | length 28.5
  Top Layer w0.381: IC2.E14@33,40.2 33.5,40.7 33.5,45.4 36.6,48.5 40,48.5 43.5,52 v1(43.5,53) Q3.1@43.5,55.5 ; RN2.5@36.75,52.8 v1@38.75,52.8
  Bottom Layer w0.381: v1(38.75,52.75) 43.218,52.75 43.468,53 v1(43.5,53)
pads on no net: *1.B4 *1.B5 *1.B6 *1.B7 *1.C1 *1.C2 *1.C3 *1.D1 *1.D2 *1.D4 *1.D5 *1.D9 *1.E4 *1.E5 *1.E7 *1.E8 *1.F3 *1.F4 *1.F5 *1.F6 *1.F7 *1.G4 *1.G5 *1.G6 *1.G7 *1.G8 *1.H3 *1.H4 *1.H5 *1.H7 IC1.6 IC2.A2 IC2.A3 IC2.A5 IC2.A12 IC2.A13 IC2.B2 IC2.B3 IC2.B4 IC2.B5 IC2.B8 IC2.B9 IC2.B10 IC2.B12 IC2.B13 IC2.B14 IC2.C3 IC2.C4 IC2.C5 IC2.C8 IC2.C9 IC2.C10 IC2.C11 IC2.C12 IC2.C13 IC2.C14 IC2.D5 IC2.D10 IC2.D11 IC2.D12 IC2.D13 IC2.E10 IC2.E11 IC2.E12 IC2.E13 IC2.F11 IC2.F12 IC2.F13 IC2.H12 IC2.H13 IC2.H14 IC2.J1 IC2.J2 IC2.J3 IC2.J4 IC2.J5 IC2.J12 IC2.J13 IC2.J14 IC2.K2 IC2.K3 IC2.K4 IC2.K11 IC2.K12 IC2.K13 IC2.K14 IC2.L1 IC2.L2 IC2.L3 IC2.L5 IC2.L6 IC2.L8 IC2.L9 IC2.L10 IC2.L11 IC2.L12 IC2.L13 IC2.L14 IC2.M2 IC2.M5 IC2.M6 IC2.M7 IC2.M8 IC2.M9 IC2.M10 IC2.M12 IC2.M13 IC2.M14 IC2.N7 IC2.N8 IC2.N9 IC2.N10 IC2.N12 IC2.N13 IC2.N14 IC2.P6 IC2.P7 IC2.P8 IC2.P9 IC2.P10 IC2.P11 IC2.P12 IC2.P13 IC5.7 IC6.9 J1.MH1 J1.MH2 J2.7 J2.8 J2.9 J2.10 J2.11 J2.12 J2.13 J2.14 J2.15 J2.16 J2.17 J3.A6 J3.A7 J3.A8 J3.B6 J3.B7 J3.B8 J3.MH J3.SH J4.MP1 J4.MP2 J5.MP1 J5.MP2 MNT1.1 MNT2.1 MNT3.1 MNT4.1 MNT5.1 MNT6.1 MNT7.1
copper on no net:
  other v6: 86,36 106,36

## Polygon pours and split planes (outlines as drawn)
3V3 on Top Layer "3V3_L01_P029" (solid, pour order 29): 23,47.25 23,49.75 20.4,49.75 20.4,48.25 21,48.25 21,47.25
GND on Top Layer "GND_L01_P037" (solid, pour order 37): 6.5,15 6.5,16.5 5.5,17.5 5.5,19.25 9,19.25 9,17.5 8,16.5 8,15
GND on Top Layer "GND_L01_P055" (solid, pour order 55): 5.25,8.807 8,8.807 8,8.25 8,1.75 5.25,1.75
GND on Top Layer "GND_L01_P038" (solid, pour order 38): 13,11.5 15.75,11.5 15.75,8.5 15.75,2 13,2
3V3 on Top Layer "3V3_L01_P046" (solid, pour order 46): 30.5,8 30.5,9 31.1,9.6 31.1,10.9 27.9,10.9 27.9,9.6 28.5,9 28.5,8
3V3+ on Top Layer "3V3+_L01_P034" (solid, pour order 34): 5,12.5 1,12.5 1,41.5 5,41.5
GND on Top Layer "GND_L01_P028" (solid, pour order 28): 35.75,50 33,50 32.5,50.5 32.5,56.5 68,56.5 68,50.5 67.5,50 64.75,50 64.75,54.5 35.75,54.5
3V3 on Top Layer "3V3_L01_P041" (solid, pour order 41): 31,11.8 31.9,10.9 35.7,10.9 35.7,15.2 31,15.2
3V3 on Top Layer "3V3_L01_P036" (solid, pour order 36): 26.5,37.5 19.25,37.5 19.25,29.25 26.5,29.25
GND on Top Layer "GND_L01_P000" (solid, pour order 0): 14.5,18 14.5,16 16.25,16 16.25,11.5 19,11.5 19,18 17.75,18
GND on Top Layer "GND_L01_P040" (solid, pour order 40): 27.5,9 32,9 35.5,9 35.5,5.5 30.5,5.5 30.5,9 28.5,9 28.5,5.5 30,5.5 30.5,5 32.5,5 32.5,1.25 28,1.25 27.5,1.75
3V3 on Top Layer "3V3_L01_P039" (solid, pour order 39): 20.75,52.5 22.75,52.5 22.75,56.75 21.25,56.75 21.25,55.25 20.75,55.25
1V8 on Top Layer "1V8_L01_P031" (solid, pour order 31): 19.25,44.25 19.25,39.75 21,39.75 21,44.25
GND on Top Layer "GND_L01_P030" (solid, pour order 30): 24.75,49.75 24.75,38.5 26.25,38.5 26.25,49.75
3V3 on Top Layer "3V3_L01_P027" (solid, pour order 27): 35.5,65.25 32.5,65.25 32.5,61.2 35.5,61.2
3V3 on Top Layer "3V3_L01_P026" (solid, pour order 26): 65,65.5 65,61.5 68,61.5 68,65.5
3V3 on Mid Layer 2 "3V3_L03_P048" (solid, pour order 48): 4,69 1,66 1,4 4,1 66,1 69,4 69,66 66,69
1V8 on Mid Layer 2 "1V8_L03_P058" (solid, pour order 58): 94,17 105,17 105,40.6 95,40.6 92,37.6 92,33.2 93.2,33.2 94,33.2 94.8,34 94.8,36 96,37.2 96,38 98.5,38 98.5,21.5 94,21.5 94,20
1V2 on Mid Layer 2 "1V2_L03_P059" (solid, pour order 59): 96.001,38 98.5,38 98.5,21.5 91,21.5 91,22 91,33.25 93.95,33.25 94,33.2 94.8,34 94.8,34.8 94.796,34.804 94.796,35.996 96,37.2
VDDAON on Mid Layer 2 "VDDAON_L03_P002" (solid, pour order 2): 31.4,33.75 38,33.75 38,31.25 37.25,31.25 35.5,29.5 31.4,29.5
1V8 on Mid Layer 2 "1V8_L03_P014" (solid, pour order 14): 21,43 21,41.1 18.7,41.1 18.7,43
GND on Bottom Layer "GND_L04_P044" (solid, pour order 44): 34.5,26.6 34.5,25.4 36,25.4 37.5,25.4 37.5,28.3 19.8,28.3 19.8,26.6
2V8 on Bottom Layer "2V8_L04_P060" (solid, pour order 60): 100.5,25.2 99.8,24.5 95,24.5 95,27.5 98,27.5 98,29.5 100.5,29.5
GND on Bottom Layer "GND_L04_P050" (solid, pour order 50): 34.5,22.8 34.5,19.8 42.056,19.8 42.1,19.844 42.1,22.5 45.5,22.5 45.5,26 50.1,26 50.1,44.25 46,44.25 46,29.75 43.5,29.75 43.5,36.75 41.6,36.75 41.6,25.5 38.7,25.5 38.7,22.8
GND on Bottom Layer "GND_L04_P054" (solid, pour order 54): 55,32.3 55,30.2 56.5,30.2 56.5,32.3
GND on Bottom Layer "GND_L04_P053" (solid, pour order 53): 51.1,32.9 51.1,31.1 52.9,31.1 52.9,32.9
GND on Bottom Layer "GND_L04_P043" (solid, pour order 43): 39.5,41.5 39.5,45.4 26.7,45.4 26.7,42.9 28.1,41.5
VDDAON on Bottom Layer "VDDAON_L04_P005" (solid, pour order 5): 46,36.75 43.5,36.75 43.5,29.75 46,29.75
VDDCORE on Bottom Layer "VDDCORE_L04_P004" (solid, pour order 4): 46,44.25 43.5,44.25 43.5,36.75 46,36.75
1V8 on Bottom Layer "1V8_L04_P033" (solid, pour order 33): 21,42.9 21,41.1 18.8,41.1 18.8,42.9
GND on Mid Layer 1 "GND_L02_P001" (solid, pour order 1): 1,4 4,1 66,1 69,4 69,66 66,69 4,69 1,66
DGND on Mid Layer 1 "DGND_L02_P057" (solid, pour order 57): 76.5,16 76.5,24.5 76.5,42.5 76.5,51 113.5,51 116,48.5 116,43 113,40 113,27 116,24 116,19 113,16
AGND on Mid Layer 1 "AGND_L02_P056" (solid, pour order 56): 92.8,41.2 92.8,34.4 93.6,34.4 93.6,31.5 82.9,31.5 82.9,41.2 85.7,41.2 85.7,39 87.1,39 87.1,41.2

## Other copper
Top Layer:
  region net NetR25_2: 75.381,50.262 75.762,49.881 75.762,49.119 75.381,48.738 74.619,48.738 74.238,49.119 74.238,49.881 74.619,50.262
Mid Layer 1:
  region net NetR25_2: 75.381,50.262 75.762,49.881 75.762,49.119 75.381,48.738 74.619,48.738 74.238,49.119 74.238,49.881 74.619,50.262
Mid Layer 2:
  region net NetR25_2: 75.381,50.262 75.762,49.881 75.762,49.119 75.381,48.738 74.619,48.738 74.238,49.119 74.238,49.881 74.619,50.262
Bottom Layer:
  region net NetR25_2: 75.381,50.262 75.762,49.881 75.762,49.119 75.381,48.738 74.619,48.738 74.238,49.119 74.238,49.881 74.619,50.262

## Silkscreen, mask and mechanical layers (free items; w line width, h text height)
Top Overlay:
  circle w0.254: c81,21 r4
  circle w0.254: c81,46 r4
  circle w0.254: c111,21 r4
  circle w0.254: c111,46 r4
  lines w0.15: 5.407,3.75 1.25,3.75 0.75,4.25 0.75,18.75 1.25,19.25 18.5,19.25 19,18.75 19,4.25 18.5,3.75 15.593,3.75 ; 6.953,3.75 14.047,3.75 ; 25.208,32.25 26.25,32.25 26.75,32.75 26.75,37.1 26.25,37.6 17.5,37.6 17,37.1 17,32.75 17.5,32.25 ; 17.5,32.25 24.792,32.25 ; 17.5,32.25 24.793,32.25 ; 17.5,32.25 17,31.75 17,27.5 17.5,27 26.25,27 26.75,27.5 26.75,31.75 26.25,32.25 25.207,32.25 24.792,32.25 ; 0.75,20.5 0.75,25.75 1.25,26.25 18.5,26.25 19,25.75 19,20.5 18.5,20 1.25,20 0.75,20.5 ; 0.75,27.5 0.75,40.25 1.25,40.75 15.575,40.75 16.075,40.25 16.075,27.5 15.575,27 1.25,27 0.75,27.5 ; 17,38.1 17,48.5 17.5,49 26.25,49 26.75,48.5 26.75,38.1 26.25,37.6 17.5,37.6 17,38.1 ; 20.235,1.608 20.235,12.858 20.735,13.358 26.236,13.358 26.736,12.858 26.736,1.608 26.236,1.108 20.735,1.108 20.235,1.608 ; 20.25,14.5 20.75,14 26.25,14 26.75,14.5 26.75,25.75 26.25,26.25 25.825,26.25 25.175,26.25 20.75,26.25 20.25,25.75 20.25,14.5 ; 27.5,1.75 27.5,21.2 28,21.7 40.5,21.7 41,21.2 41,1.75 40.5,1.25 28,1.25 27.5,1.75 ; 32.5,50.5 33,50 67.5,50 68,50.5 68,67 67.5,67.5 33,67.5 32.5,67 32.5,50.5
  lines w0.2: 28.5,9.3 40,9.3 ; 28.5,15.6 40,15.6
  text "3V3" at 39.472,62.004 h2 r90
  text "RX" at 41.996,62.004 h2 r90
  text "TX" at 44.496,62.004 h2 r90
  text "AR0" at 46.972,62.002 h2 r90
  text "STM" at 49.472,62 h2 r90
  text "DBG" at 51.972,62.004 h2 r90
  text "0V8" at 54.472,62.004 h2 r90
  text "1V2" at 56.996,62.004 h2 r90
  text "1V8" at 59.472,62.004 h2 r90
  text "2V8" at 61.972,62.004 h2 r90
  text "DEBUG CENTRAL" at 42.5,51.024 h2
  text "RIBBON CABLE TO LMS" at 73.5,41.507 h1 r270
  text "MOSFETs" at 18.976,39.502 h2 r90
  text "ON" at 3,39.262 h1
  text "OFF" at 6.5,39.262 h1
  text "HSE" at 19.226,33 h2 r90
  text "CQNCR" at 9,28.17 h2
  text "LSE" at 19.226,27.75 h2 r90
  text "SENSOR CONNECTOR" at 68,27.659 h1.5 r90
  text "BOOT" at 20.25,24.5 h1.5
  text "C2Sv0" at 44.5,18.596 h8
  text "TO PROCESSOR" at 91.75,18.514 h1.2
  text "<- DGND / AGND -> /  / DO NOT CONNECT" at 69.627,17.5 h1.3
  text "1V2" at 28.5,16.2 h2
  text "Felix Abbott" at 47,15.036 h3
  text "Sept. 2025" at 47.994,12.53 h3
  text "TRIG" at 20.25,11.5 h1.5
  text "2V8" at 37.7,9.918 h1.5
  text "USBC" at 2.976,4.752 h2 r90
  text "1V8" at 37.208,3.024 h2
Mechanical 1:
  circle w0.1: c59.05,44.9 r1
  circle w0.1: c59.05,24.9 r1
Board Shape:
  lines w0.15: 71,51 71,51 ; 78.5,16 75,16 71,16 ; 78.5,51 74.999,51 71,51 ; 116,24 116,43 ; 70,52 70,52 ; 70,52 70,67 67,70 3,70 0,67 0,3 3,0 67,0 70,3 70,15 71,16 ; 70,52 71,51 ; 71,16 71,16
  lines w0.2: 78.5,16 113.5,16 116,18.5 116,24 ; 78.5,51 113.5,51 116,48.5 116,43